# Altium PCB auxpreamp_riaa.PcbDoc
Units mm, origin at the board's own origin, x right, y up, seen from the top; angles counter-clockwise.
Board outline 132.21 x 81.15 mm, 2 copper layers (Top Layer, Bottom Layer); 68 components, 38 nets, 161 pads, 9 vias.
Unrouted connection lines stored in the file: 2.
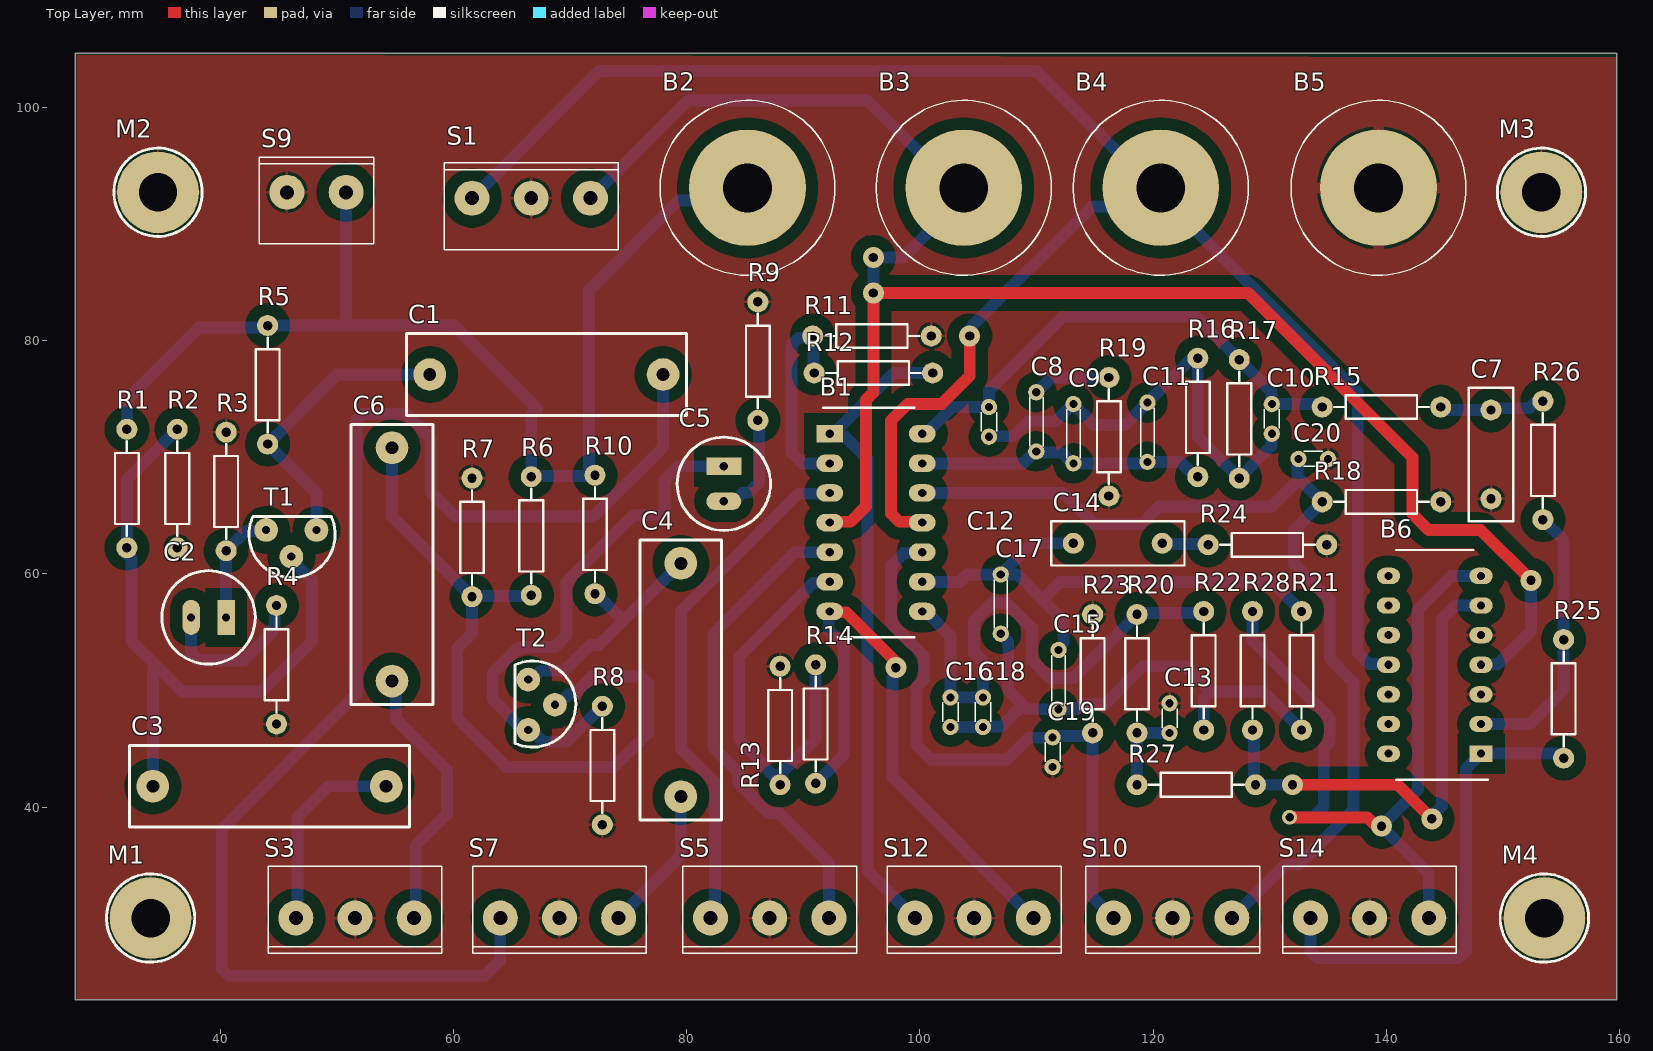
[diagram p0: Top Layer view]
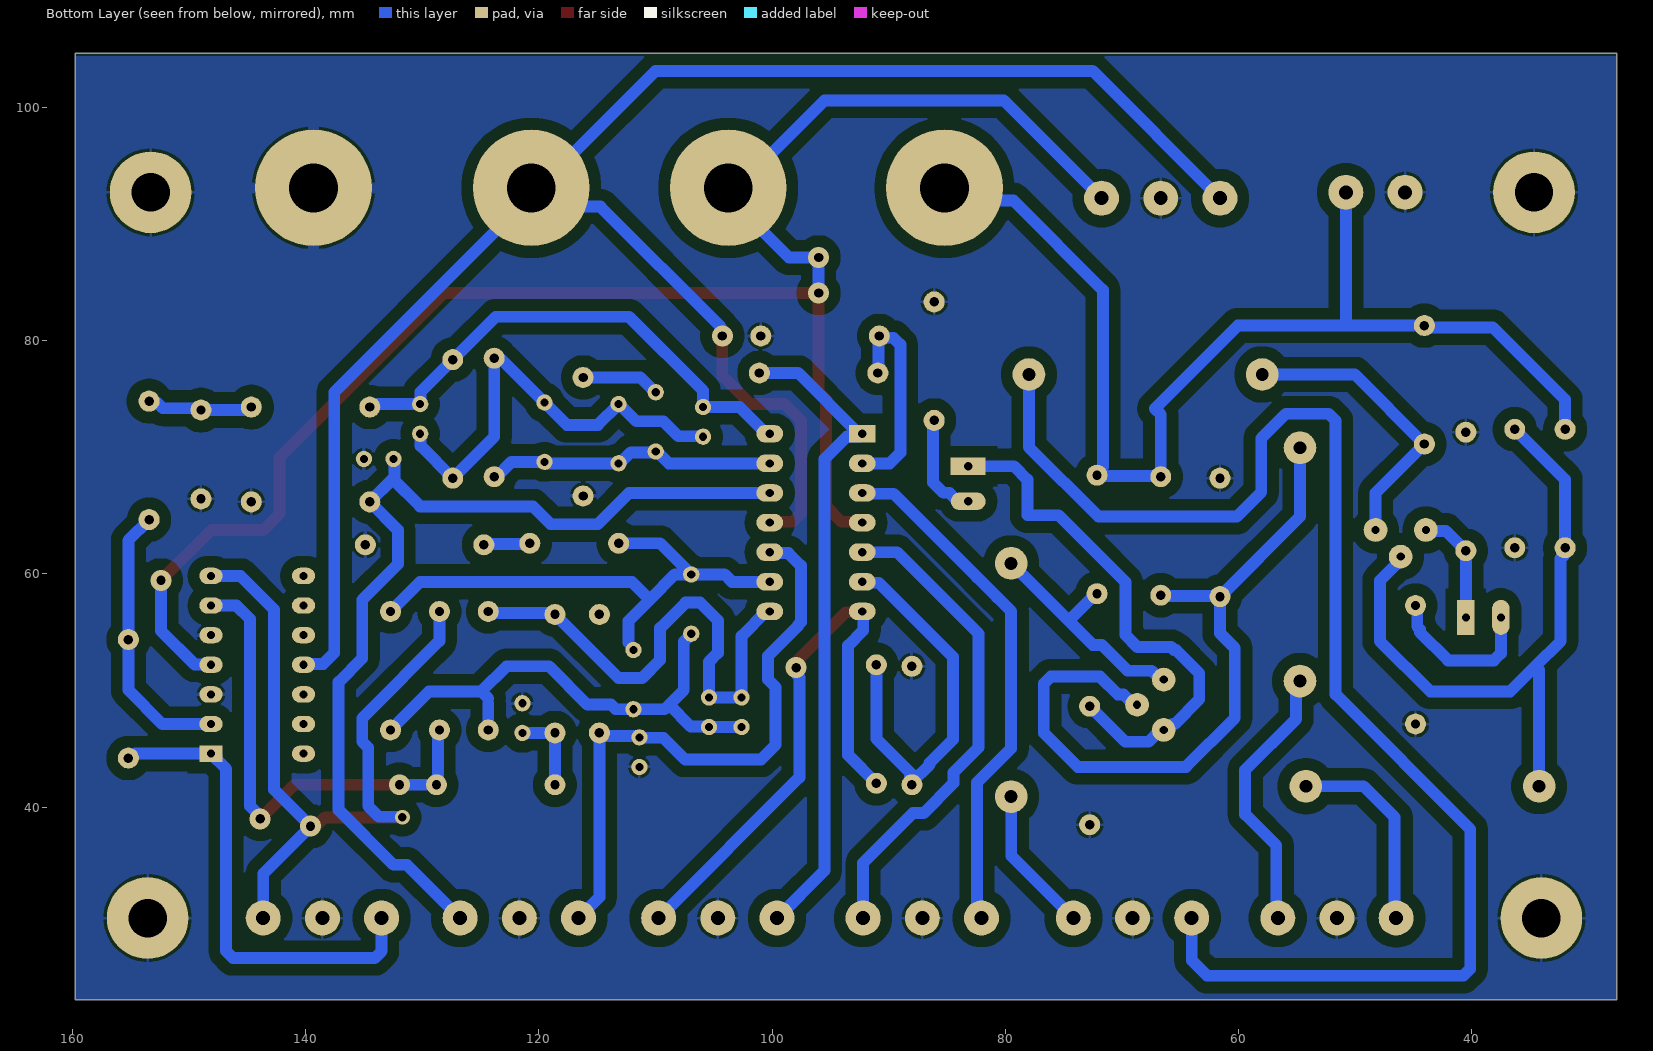
[diagram p1: Bottom Layer view, seen from below]

## Layer stack, top to bottom
Top Solder: solder mask 0.0102, Solder Resist, Dk 3.5
Top Layer: signal copper 0.0356
Dielectric 1: dielectric 0.32, FR-4, Dk 4.8
Bottom Layer: signal copper 0.0356
Bottom Solder: solder mask 0.0102, Solder Resist, Dk 3.5

## Board outline
27.559,23.495 159.766,23.495 159.766,104.648 27.559,104.648

## Design rules (kind name [scope] priority, off if disabled: settings)
Clearance [All] p1: gap=1.016 ignorepadtopadclearanceinfootprint=FALSE
PolygonConnect [All] p1: connectstyle=Relief reliefconductorwidth=0.254 reliefentries=4 polygonreliefangle="90 Angle" airgapwidth=0.254
RoutingVias [All] p1: holewidth=0.711 width=1.27 viastyle="Through Hole" minholewidth=0.711 minwidth=1.27 maxholewidth=0.711 maxwidth=1.27
SolderMaskExpansion [All] p1: expansion=0.102 istentingtop=FALSE
Width [All] p1: maxlimit=1.016 minlimit=1.016 preferedwidth=1.016 minimp=50.000000 maximp=50.000000 favimp=50.000000
30 further rules are at their usual default settings.

## Components (designator, comment, footprint, x,y, rotation, side; value= is the part's Value field where it differs from the comment)
B1 "TLC274CN" DIP794W53P254L1930H508Q14N#1 96.233,64.389 r0 top
B2 "Banana Plug" "Banana Plug On top" 85.217,93.091 r0 top
B3 "Banana Plug" "Banana Plug On top" 103.759,93.091 r0 top
B4 "Banana Plug" "Banana Plug On top" 120.65,93.091 r0 top
B5 "Banana Plug" "Banana Plug On top" 139.319,93.091 r0 top
B6 "TLC274CN" DIP794W53P254L1930H508Q14N#2 144.145,52.197 r180 top
C1 "Cap" "CAP 20MM" 57.978,77.089 r0 top
C2 "Cap" "Cap Ø8" 40.513,56.261 r180 top
C3 "Cap" "CAP 20MM" 54.229,41.783 r180 top
C4 "Cap" "CAP 20MM" 79.502,60.894 r270 top
C5 "Cap" "Cap Ø8" 83.185,69.215 r270 top
C6 "Cap" "CAP 20MM" 54.737,50.8 r90 top
C7 "Cap" "RAD-0.3  PCBK" 148.971,70.231 r90 top value=1.2nF
C8 "Cap" Cap-1 109.982,75.565 r270 top
C9 "Cap" Cap-1 113.157,69.469 r90 top
C10 "Cap" Cap-0 130.175,72.009 r90 top
C11 "Cap" Cap-1 119.507,69.596 r90 top
C12 "Cap" Cap-0 105.918,71.755 r90 top
C13 "Cap" Cap-0 121.412,48.895 r270 top
C14 "Cap" "RAD-0.3  PCBK" 116.967,62.611 r180 top value=1.6uF
C15 "Cap" Cap-1 111.887,53.467 r270 top
C16 "Cap" Cap-0 102.616,46.863 r90 top
C17 "Cap" Cap-1 106.934,59.944 r270 top
C18 "Cap" Cap-0 105.41,46.863 r90 top
C19 "Cap" Cap-0 111.379,43.434 r90 top
C20 "Cap" Cap-0 132.461,69.85 r0 top
M1 "Screw Hole" "M3 Hole" 34.036,30.48 r0 top
M2 "Screw Hole" "M3 Hole" 34.671,92.71 r0 top
M3 "Screw Hole" "M3 Hole" 153.289,92.71 r0 top
M4 "Screw Hole" "M3 Hole" 153.543,30.48 r0 top
R1 "R1" "AXIAL-0.4 PCBK" 32.004,67.31 r90 top value=3M
R2 "R2" "AXIAL-0.4 PCBK" 36.322,67.31 r90 top value=1.1M
R3 "R3" "AXIAL-0.4 PCBK" 40.513,67.056 r270 top value=6k
R4 "R4" "AXIAL-0.4 PCBK" 44.831,52.197 r90 top value=100k
R5 "R5" "AXIAL-0.4 PCBK" 44.069,76.2 r90 top value=23.3k
R6 "R6" "AXIAL-0.4 PCBK" 66.675,63.246 r90 top value=3M
R7 "" "AXIAL-0.4 PCBK" 61.595,63.119 r270 top value=1.1M
R8 "R8" "AXIAL-0.4 PCBK" 72.771,43.561 r90 top value=6k
R9 "" "AXIAL-0.4 PCBK" 86.106,78.232 r270 top value=100k
R10 "R10" "AXIAL-0.4 PCBK" 72.136,63.373 r90 top value=23.3k
R11 "R6" "AXIAL-0.4 PCBK" 95.885,80.391 r0 top value=1k
R12 "R6" "AXIAL-0.4 PCBK" 96.012,77.216 r180 top value=2.88k
R13 "R6" "AXIAL-0.4 PCBK" 88.011,46.99 r90 top value=1k
R14 "R6" "AXIAL-0.4 PCBK" 91.059,47.117 r90 top value=2.88k
R15 "R4" "AXIAL-0.4 PCBK" 139.573,74.295 r180 top value=2k
R16 "R4" "AXIAL-0.4 PCBK" 123.825,73.406 r270 top value=1.44M
R17 "R4" "AXIAL-0.4 PCBK" 127.381,73.279 r270 top value=118.41k
R18 "R4" "AXIAL-0.4 PCBK" 139.573,66.167 r180 top value=47k
R19 "R4" "AXIAL-0.4 PCBK" 116.205,71.755 r90 top value=5k
R20 "R4" "AXIAL-0.4 PCBK" 118.618,51.435 r90 top value=2k
R21 "R4" "AXIAL-0.4 PCBK" 132.715,51.689 r90 top value=1.44M
R22 "R4" "AXIAL-0.4 PCBK" 124.333,51.689 r270 top value=118.41k
R23 "R4" "AXIAL-0.4 PCBK" 114.808,51.435 r270 top value=47k
R24 "R4" "AXIAL-0.4 PCBK" 129.794,62.484 r180 top value=5k
R25 "R4" "AXIAL-0.4 PCBK" 155.194,49.276 r270 top value=825k
R26 "R4" "AXIAL-0.4 PCBK" 153.416,69.723 r270 top value=100k
R27 "R4" "AXIAL-0.4 PCBK" 123.698,41.91 r0 top value=100k
R28 "R4" "AXIAL-0.4 PCBK" 128.524,51.689 r90 top value=825k
S1 "S2" Screw-3 71.75,92.202 r180 top
S3 "S4" Screw-3 46.492,30.48 r0 top
S5 "S6" Screw-3 82.047,30.48 r0 top
S7 "S8" Screw-3 64.018,30.48 r0 top
S9 "Screw 2" Screw-2 50.8,92.71 r180 top
S10 "S11" Screw-3 116.596,30.48 r0 top
S12 "S13" Screw-3 99.578,30.48 r0 top
S14 "S15" Screw-3 133.482,30.48 r0 top
T1 "BC547" TO92 47.498,63.627 r180 top
T2 "BC547" TO92 66.548,50.165 r270 top

## Footprints (in the part's own frame and the unit in brackets; to place one, negate y for a bottom-side part, rotate by r counter-clockwise, add the part's x,y. Pads: shape width x height; smd on the part's side, far side on the other; paste and mask are expansions set on the pad)
"AXIAL-0.4 PCBK" [mm]
  round 1.8 hole 0.8: 1(-5.08,0) 2(5.08,0)
  silkscreen extent -4.06,-1.02 4.06,1.02
"Banana Plug On top" [mm] "Banana Plug"
  round 10 hole 4.2: 1(0,0)
  silkscreen extent -7.5,-7.5 7.5,7.5
"CAP 20MM" [mm] "Capacitor with 20mm hole distance (center)"
  round 2.8 hole 1.1: 1(0,0) 2(20,0)
  silkscreen extent -2,-3.5 22,3.5
"Cap Ø8" [mm] "Capacitor"
  rect 1.5x3 hole 0.7: 1(0,0)
  oval 1.5x3 hole 0.7: 2(3,0)
  silkscreen extent -2.5,-4 5.5,4
Cap-0 [mm] "Capacitor with no space"
  round 1.4 hole 0.7: 1(0,0) 2(2.54,0)
  silkscreen extent 0.45,-0.65 2.1,0.65
Cap-1 [mm] "Capacitor with 1 space"
  round 1.4 hole 0.7: 1(0,0) 2(5.08,0)
  silkscreen extent 0.45,-0.58 4.62,0.58
DIP794W53P254L1930H508Q14N#1 [mm]
  rect 2.3x1.5 hole 0.7: 1(-3.97,7.62)
  oval 2.3x1.5 hole 0.7: 2(-3.97,5.08) 3(-3.97,2.54) 4(-3.97,0) 5(-3.97,-2.54) 6(-3.97,-5.08) 7(-3.97,-7.62) 8(3.97,-7.62) 9(3.97,-5.08) 10(3.97,-2.54) 11(3.97,0) 12(3.97,2.54) 13(3.97,5.08) 14(3.97,7.62)
  silkscreen extent -4.53,-9.84 3.3,9.84
DIP794W53P254L1930H508Q14N#2 [mm]
  rect 2x1.4 hole 0.7: 1(-3.97,7.62)
  oval 2x1.4 hole 0.7: 2(-3.97,5.08) 3(-3.97,2.54) 4(-3.97,0) 5(-3.97,-2.54) 6(-3.97,-5.08) 7(-3.97,-7.62) 8(3.97,-7.62) 9(3.97,-5.08) 10(3.97,-2.54) 11(3.97,0) 12(3.97,2.54) 13(3.97,5.08) 14(3.97,7.62)
  silkscreen extent -4.53,-9.84 3.3,9.84
"M3 Hole" [mm]
  round 7 hole 3.3 mask+0: 1(0,0)
  silkscreen extent -3.78,-3.78 3.79,3.78
"RAD-0.3  PCBK" [mm]
  round 1.8 hole 0.8: 1(-3.81,0) 2(3.81,0)
  silkscreen extent -5.71,-1.91 5.71,1.91
Screw-2 [mm] "Screw Terminal with 2 connections"
  round 3 hole 1.2: 1(0,0) 2(5.075,0)
  silkscreen extent -2.37,-3.03 7.45,4.43, body extent -3.07,-3.1 7.53,4.5, height 10
Screw-3 [mm] "Screw Terminal with 3 connections"
  round 3 hole 1.2: 1(0,0) 2(5.075,0) 3(10.15,0)
  silkscreen extent -2.37,-3.03 12.52,4.43, body extent -2.95,-3.8 12.55,4, height 10.3
TO92 [mil]
  round 80 hole 27.56: 1(-30,-5) 2(55,85) 3(140,-5)
  silkscreen extent -93,-50 198,156, body extent -55,-85 145,115, height 10

## Part data
B1 B6: "Quad Single Supply Operational Amplifier", Manufacturer_Name="Texas Instruments", Mouser Part Number=595-TLC274CN, Datasheet Link=http://www.ti.com/lit/gpn/tlc274, Geometry.Height=5.08mm, Manufacturer_Part_Number=TLC274CN, Mouser Price/Stock=https://www.mouser.co.uk/ProductDetail/Texas-Instruments/TLC274CN?qs=Zu35EjizYSRqAk%2FahP1cKg%3D%3D
C1 C3 C4 C6: library part "Capacitor big ceramic", Capacity=3.3uF
C2 C5: library part "Capacitor unpolarized", Capacity=100uF
C7 C14: library part "Cap PCBK", "Capacitor", LatestRevisionDate=17-Jul-2002, LatestRevisionNote="Re-released for DXP Platform.", PackageReference=RAD-0.3, Published=8-Jun-2000, Publisher="Altium Limited"
C8: library part "Capacitor 1 space", Capacity=1.6uF
C9 C11 C15 C17: library part "Capacitor 1 space", Capacity=2,2nF
C10 C12 C16 C18 C19 C20: library part "Capacitor 0 space", Capacity=633.39pF
C13: library part "Capacitor 0 space", Capacity=1.2nF
R1 R2 R3 R4 R5 R6 R7 R8 R9 R10 R11 R12 R13 R14 R15 R16 R17 R18 R19 R20 R21 R22 R23 R24 R25 R26 R27 R28: library part "Res PCBK", "Resistor", LatestRevisionDate=17-Jul-2002, LatestRevisionNote="Re-released for DXP Platform.", PackageReference=AXIAL-0.4, Published=8-Jun-2000, Publisher="Altium Limited"
S1 S3 S5 S7 S10 S12 S14: library part "Screw 3"
T1 T2: "Trans GP BJT NPN 45V 0.1A 500mW 3-Pin TO-92 T/R", Package=None, Check_prices=https://www.snapeda.com/parts/BC547/Onsemi/view-part/?ref=eda, MF="ON Semiconductor", MP=BC547, SnapEDA_Link=https://www.snapeda.com/parts/BC547/Onsemi/view-part/?ref=snap

## Via types
v1: diameter 1.8, hole 0.8, Top Layer to Bottom Layer, 8 vias
v2: diameter 1.27, hole 0.711, Top Layer to Bottom Layer, 1 vias

## Nets (pads, with @x,y where several pads share a name; then routed paths per layer and width w, separated by ;. In a path a pad name is that pad's centre, name@x,y a point inside that pad or via, vN(x,y) a via of type N, cw(c..) or ccw(c..) an arc to the next point about the centre after c; other vN are vias at no path point)
30V: B2.1 R1.2 R5.2 R6.2 R10.2 S9.1 | length 99.9
  Bottom Layer w1.016: R1.2 32.004,74.93 38.204,81.13 43.919,81.13 R5.2 50.927,81.28 ; S9.1 50.8,81.407 50.927,81.28 ; B2.1@85.217,93.726 83.498,92.007 79.307,92.007 71.628,84.328 71.628,69.173 72.136,68.665 R10.2 72.072,68.389 66.739,68.389 R6.2 66.675,73.66 67.183,74.168 60.071,81.28 50.927,81.28
+5: B1.4 B3.1 B6.4 S1.1 | length 153.3
  Top Layer w1.016: B1.4 92.336,64.462 94.053,64.462 95.377,65.786 95.377,74.912 96.012,75.547 v1(96.012,84.074) 128.142,84.074 142.229,69.987 142.229,65.163 143.649,63.743 148.093,63.743 v1(152.4,59.436)
  Bottom Layer w1.016: S1.1 80.132,100.584 95.504,100.584 103.759,92.329 98.552,87.122 v1(96.012,87.122) v1(96.012,84.074) ; B6.4 148.14,52.222 149.504,52.222 152.4,55.118 v1(152.4,59.436)
-5: B1.11 B4.1 B6.11 S1.3 | length 161.4
  Top Layer w1.016: B1.11 100.13,64.462 98.225,64.462 97.529,65.158 97.529,73.145 98.955,74.571 101.875,74.571 104.267,76.963 v1(104.267,80.391)
  Bottom Layer w1.016: S1.3 72.522,103.124 109.982,103.124 B4.1@120.367,92.739 ; v1(104.267,80.391) 104.417,80.541 104.417,81.176 114.721,91.48 119.674,91.48 120.65,92.456 137.541,75.565 137.541,53.213 138.484,52.27 140.102,52.27 B6.11
GND: B5.1 B6.3 B6.5 C7.1 C13.1 C19.1 C20.2 M1.1 M2.1 M3.1 M4.1 R2.1 R3.1 R4.1 R7.1 R8.1 R9.1 R11.2 R13.2 R18.1 R19.1 R23.1 R24.1 S1.2 S3.2 S5.2 S7.2 S9.2 S10.2 S12.2 S14.2
NetB1_1: B1.1 R12.1 S12.1 | length 55.9
  Bottom Layer w1.016: B1.1 92.505,71.767 93.581,71.767 95.497,69.851 95.497,54.697 95.515,54.679 95.515,34.543 S12.1 ; B1.1@92.563,72.009 97.77,77.216 R12.1
NetB1_2: B1.2 R11.1 R12.2 | length 18.2
  Bottom Layer w1.016: R12.2 90.868,77.279 90.868,80.328 R11.1 90.655,80.241 89.599,80.241 89.004,79.646 89.004,70.381 89.916,69.469 B1.2
NetB1_3: B1.3 S5.1 | length 44.5
  Bottom Layer w1.016: S5.1@82.426,30.48 82.426,42.105 79.502,45.029 79.502,56.769 80.703,57.97 80.713,57.97 82.426,59.683 82.426,59.693 89.589,66.856 92.19,66.856 B1.3
NetB1_5: B1.5 S5.3 | length 41.9
  Bottom Layer w1.016: S5.3 92.197,35.208 87.919,39.486 87.007,39.486 84.458,42.035 84.458,42.947 82.296,45.109 82.296,54.863 89.282,61.849 B1.5
NetB1_6: B1.6 R13.1 R14.2 | length 34.2
  Bottom Layer w1.016: R13.1 88.161,42.06 88.161,42.957 91.059,45.855 R14.2 ; R13.1@88.011,42.122 86.49,43.643 86.49,43.789 84.495,45.783 84.495,52.872 90.859,59.236 92.19,59.236 B1.6
NetB1_7: B1.7 R14.1 S12.3 | length 50.8
  Top Layer w1.016: B1.7 92.336,56.696 93.672,56.696 97.789,52.579 97.789,52.093 v1(97.939,51.943)
  Bottom Layer w1.016: R14.1 93.483,44.461 93.483,53.837 92.18,55.14 92.18,56.592 92.263,56.675 B1.7 ; v1(97.939,51.943) 97.789,51.793 97.789,51.239 97.663,51.113 97.663,42.545 S12.3
NetB1_8: B1.8 C16.2 C18.2 R20.2 R22.1 | length 45.2
  Bottom Layer w1.016: B1.8 100.503,56.769 102.616,54.656 C16.2 C18.2 105.41,52.451 104.648,53.213 104.648,56.007 106.172,57.531 107.412,57.531 109.601,55.342 109.601,52.608 111.155,51.054 113.157,51.054 R20.2 118.745,56.642 124.206,56.642 R22.1
NetB1_9: B1.9 C14.2 C15.1 C17.1 R21.2 | length 47.1
  Bottom Layer w1.016: B1.9 103.438,59.309 104.073,59.944 C17.1 ; 112.303,54.102 112.303,55.972 110.49,57.785 ; C14.2 109.601,62.611 C17.1 ; R21.2 130.175,59.309 112.014,59.309 110.49,57.785 ; C17.1 108.331,59.944 110.49,57.785
NetB1_10: B1.10 C19.2 R23.2 S10.1 | length 53.2
  Bottom Layer w1.016: B1.10 100.13,61.776 98.606,61.776 97.529,60.699 97.529,55.848 97.79,55.587 97.79,55.52 100.363,52.947 100.363,50.939 99.695,50.271 99.695,45.339 100.965,44.069 107.442,44.069 109.312,45.939 111.259,45.939 C19.2@111.379,46.059 ; C19.2@111.379,46.101 114.342,46.101 114.596,46.355 R23.2 114.808,46.101 114.808,32.268 S10.1@116.663,30.413
NetB1_12: B1.12 C20.1 R18.2 S10.3 | length 83.2
  Bottom Layer w1.016: B1.12 112.267,66.929 114.945,64.251 118.989,64.251 120.513,65.775 130.184,65.775 132.534,68.126 R18.2 132.08,63.754 132.08,60.832 135.139,57.773 135.139,52.741 137.171,50.709 137.171,39.745 132.474,35.049 131.315,35.049 S10.3 ; 132.388,68.253 132.388,69.777 C20.1
NetB1_13: B1.13 C8.2 C9.1 C11.1 R16.2 | length 25
  Bottom Layer w1.016: B1.13 108.862,69.469 109.878,70.485 C8.2 110.055,70.412 112.111,70.412 113.053,69.469 C9.1 119.276,69.469 119.403,69.596 C11.1 122.343,69.596 123.613,68.326 R16.2
NetB1_14: B1.14 C10.2 C12.2 R15.2 R17.1 | length 42.2
  Bottom Layer w1.016: B1.14 100.503,72.009 102.789,74.295 C12.2 105.918,75.692 112.268,82.042 123.698,82.042 R17.1 130.14,75.6 130.14,74.584 C10.2 R15.2@133.731,74.549
NetB6_1: B6.1 R25.2 S14.1 | length 41.5
  Bottom Layer w1.016: S14.1 133.482,27.646 134.077,27.051 146.217,27.051 146.812,27.646 146.812,43.274 147.623,44.085 147.623,44.385 147.815,44.577 B6.1 154.601,44.577 154.982,44.196 R25.2
NetB6_2: B6.2 R25.1 R26.2 | length 23.6
  Bottom Layer w1.016: B6.2 152.273,47.117 155.194,50.038 R25.1 155.194,62.865 R26.2
NetB6_6: B6.6 R27.2 R28.1 | length 42.4
  Top Layer w1.016: v1(131.953,41.91) 140.97,41.91 v1(143.891,38.989)
  Bottom Layer w1.016: R28.1 128.651,46.482 128.651,42.037 R27.2 v1(131.953,41.91) ; v1@143.891,38.994 143.891,39.201 144.78,40.09 144.78,56.134 145.923,57.277 B6.6
NetB6_7: B6.7 R28.2 S14.3 | length 67.2
  Top Layer w1.016: v2@131.701,39.114 138.349,39.114 138.959,38.504 139.423,38.504 v1(139.573,38.354)
  Bottom Layer w1.016: R28.2 128.524,54.24 134.631,48.133 134.631,48.121 135.139,47.613 135.139,45.605 134.631,45.097 134.631,40.079 133.715,39.163 131.74,39.163 v2@131.699,39.121 ; S14.3 143.632,34.295 v1(139.573,38.354) 142.699,41.48 142.699,56.927 145.589,59.817 B6.7
  other v2: 131.699,39.116
NetC1_1: C1.1 R5.1 T1.1 | length 25.5
  Bottom Layer w1.016: T1.1 48.26,66.929 R5.1 50.038,77.089 C1.1
NetC1_2: C1.2 S7.1 | length 121.7
  Bottom Layer w1.016: S7.1 64.018,26.847 62.698,25.527 40.727,25.527 40.132,26.122 40.132,38.1 51.689,49.657 51.689,73.129 52.284,73.724 55.948,73.724 58.053,71.619 58.053,67.002 60.158,64.897 72.008,64.897 77.978,70.867 C1.2
NetC2_1: C2.1 R3.2 T1.3 | length 9.9
  Bottom Layer w1.016: C2.1 R3.2 R3.2@40.531,61.976 ; R3.2@40.551,61.976 R3.2@40.531,61.976 ; T1.3 43.869,63.681 42.236,63.681 R3.2@40.531,61.976
NetC2_2: C2.2 R4.2 | length 13.7
  Bottom Layer w1.016: C2.2 37.513,53.173 38.108,52.578 42.037,52.578 44.45,54.991 44.45,55.245 44.681,55.476 44.681,57.127 R4.2
NetC3_1: C3.1 S3.1 | length 17.4
  Bottom Layer w1.016: S3.1@46.619,30.48 46.619,39.126 49.276,41.783 C3.1
NetC3_2: C3.2 R1.1 R2.2 T1.2 | length 57.6
  Bottom Layer w1.016: C3.2 34.229,51.755 34.544,52.07 ; R2.2 32.004,68.072 R1.1 32.154,62.08 32.154,61.526 32.385,61.295 32.385,54.229 34.544,52.07 ; T1.2 46.101,61.193 47.879,59.415 47.879,54.229 43.561,49.911 36.703,49.911 34.544,52.07
NetC4_1: C4.1 R10.1 T2.1 | length 20.8
  Bottom Layer w1.016: T2.1 66.696,50.927 67.458,51.689 69.517,51.689 71.728,53.9 72.508,53.9 74.582,55.974 ; R10.1 72.263,58.293 74.582,55.974 ; C4.1@79.309,60.894 C4.1 74.582,55.974
NetC4_2: C4.2 S7.3 | length 12.8
  Bottom Layer w1.016: S7.3@74.025,30.337 79.495,35.807 C4.2@79.495,40.887
NetC5_1: C5.1 R8.2 T2.3 | length 46
  Bottom Layer w1.016: R8.2 69.723,45.593 67.712,45.593 66.696,46.609 T2.3 66.146,46.609 65.638,47.117 65.492,47.117 63.373,49.236 63.373,51.471 65.369,53.467 65.532,53.467 65.786,53.721 68.676,53.721 69.712,54.757 69.712,59.297 75.439,65.024 78.105,65.024 78.105,68.072 79.248,69.215 C5.1
NetC5_2: C5.2 R9.2 | length 9.1
  Bottom Layer w1.016: C5.2 84.066,66.215 84.792,66.941 85.316,66.941 86.209,67.834 86.209,73.049 R9.2
NetC6_1: C6.1 S3.3 | length 23.4
  Bottom Layer w1.016: C6.1 55.078,50.459 55.078,47.538 59.436,43.18 59.436,39.37 56.769,36.703 56.769,30.607 S3.3
NetC6_2: C6.2 R6.1 R7.2 T2.2 | length 64.6
  Bottom Layer w1.016: C6.2 54.737,64.897 R7.2 ; R6.1@66.611,58.229 R6.1 66.611,58.102 61.658,58.102 R7.2 ; T2.2 68.982,48.768 69.871,49.657 70.359,49.657 71.883,51.181 76.113,51.181 76.708,50.586 76.708,46.355 73.787,43.434 64.516,43.434 60.325,47.625 60.325,53.636 61.595,54.906 R7.2
NetC7_2: C7.2 R15.1 R26.1 | length 9.1
  Bottom Layer w1.016: R15.1@144.611,74.041 C7.2 149.121,74.191 152.25,74.191 152.712,74.653 153.266,74.653 R26.1
NetC8_1: C8.1 R19.2 | length 6.7
  Bottom Layer w1.016: C8.1 110.032,75.565 111.302,76.835 R19.2
NetC9_2: C9.2 C10.1 C11.2 C12.1 R16.1 R17.2 | length 38.9
  Bottom Layer w1.016: C12.1 105.953,71.79 108.035,71.79 109.322,73.077 111.635,73.077 113.107,74.549 C9.2 114.935,72.771 117.602,72.771 C11.2 119.509,74.676 123.169,78.336 123.675,78.336 R16.1 123.825,71.755 R17.2 130.14,70.958 130.14,71.974 C10.1
NetC13_2: C13.2 R20.1 R27.1 | length 7.2
  Bottom Layer w1.016: R27.1 R20.1 C13.2
NetC14_1: C14.1 R24.2 | length 4
  Bottom Layer w1.016: C14.1 120.84,62.547 124.65,62.547 R24.2
NetC15_2: C15.2 C16.1 C17.2 C18.1 R21.1 R22.2 | length 44.8
  Bottom Layer w1.016: C16.1 C18.1 105.445,46.898 106.969,46.898 108.834,48.763 ; C17.2 106.934,54.814 107.569,54.179 107.569,50.028 108.834,48.763 ; R22.2 124.333,48.895 ; 124.333,49.316 124.928,49.911 ; R21.1 129.413,49.911 124.928,49.911 ; 108.834,48.763 109.21,48.387 C15.2 113.412,48.387 113.804,48.779 115.835,48.779 119.126,52.07 122.769,52.07 124.928,49.911
pads on no net: B6.8 B6.9 B6.10 B6.12 B6.13 B6.14

## Polygon pours and split planes (outlines as drawn)
GND on Bottom Layer "GND_L02_P001" (solid, pour order 1): 27.559,104.394 27.559,23.495 159.766,23.495 159.766,104.394
GND on Top Layer "GND_L01_P000" (solid, pour order 0): 27.559,104.521 27.686,104.394 27.686,23.495 159.766,23.495 159.766,104.293